# Altium PCB PCB_HNano.pcbdoc
Units mil, origin at the board's own origin, x right, y up, seen from the top; angles counter-clockwise.
Board outline 4465 x 4795 mil, 2 copper layers (Top Layer, Bottom Layer); 16 components, 38 nets, 80 pads, 20 vias.
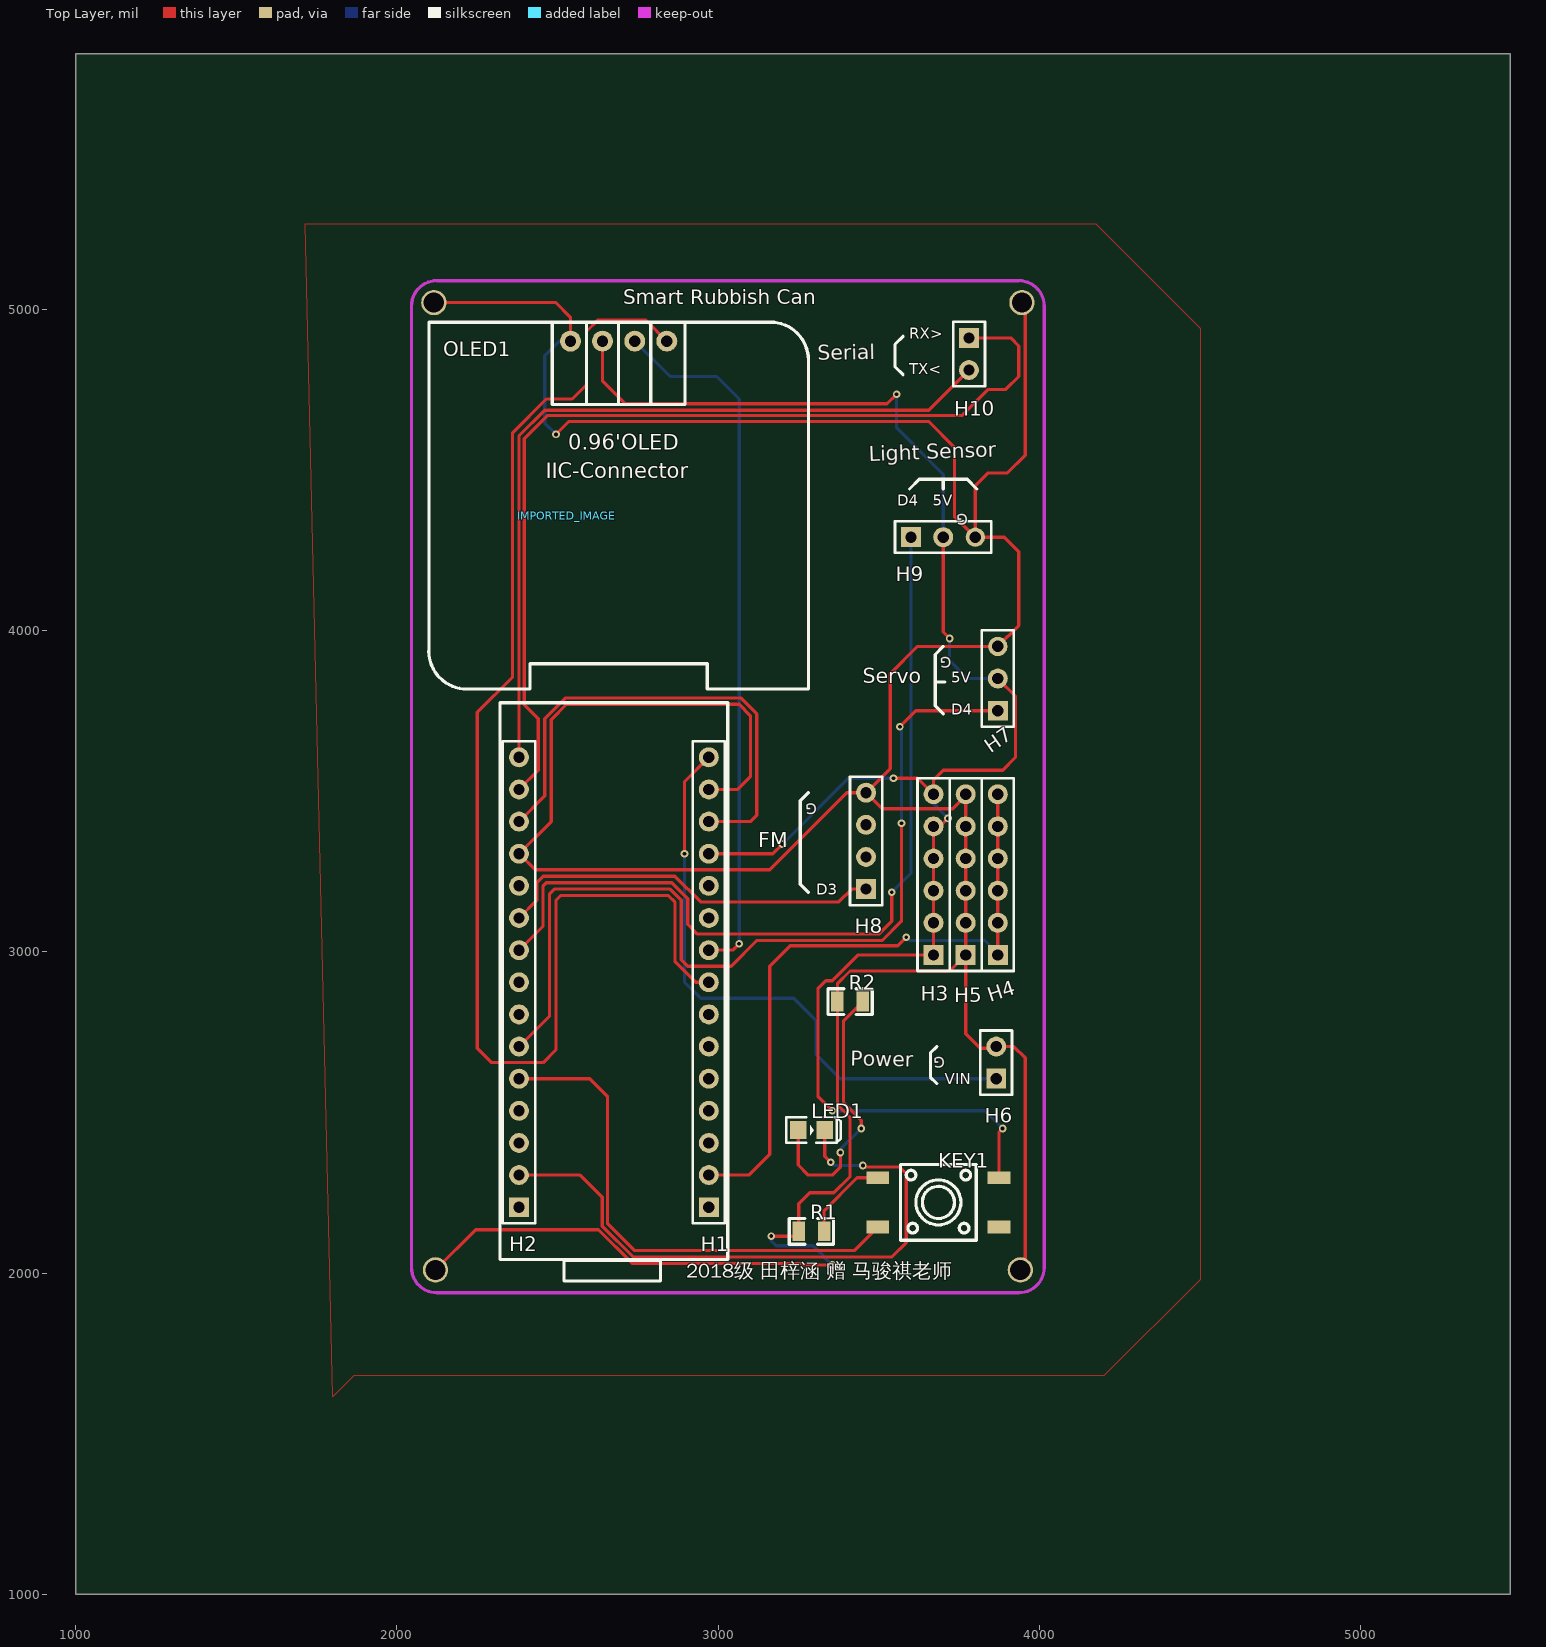
[diagram p0: Top Layer view]
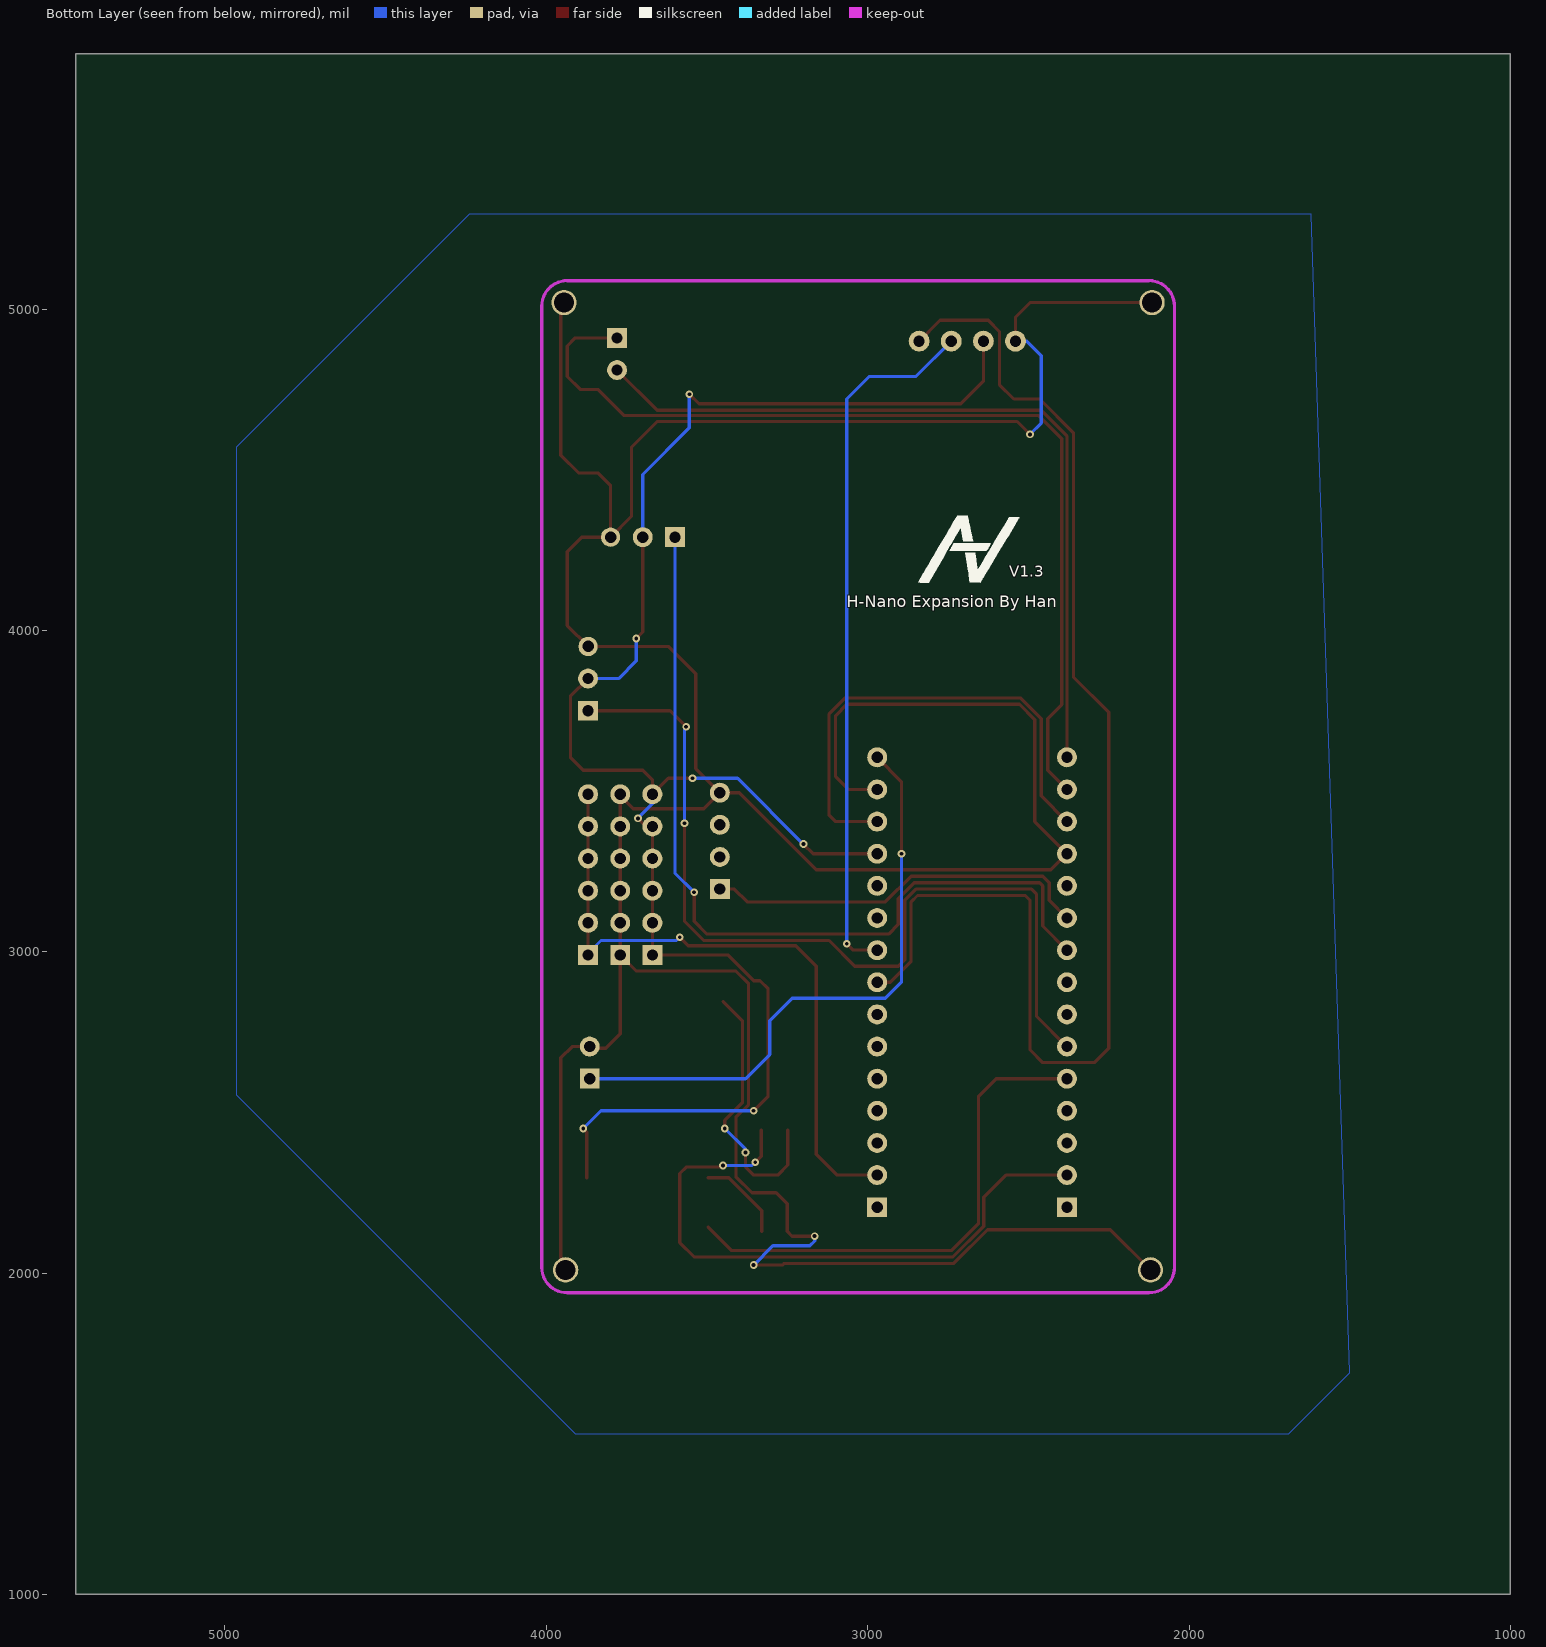
[diagram p1: Bottom Layer view, seen from below]

## Layer stack, top to bottom
Top Layer: signal copper (thickness not stored)
Dielectric: dielectric 12.6, FR-4, Dk 4.8
Bottom Layer: signal copper (thickness not stored)

## Board outline
5465,1000 1000,1000 1000,5795 5465,5795

## Components (designator, comment, footprint, x,y, rotation, side; value= is the part's Value field where it differs from the comment)
H1 "HDR-F-2.54_1x15" HDR-F-2.54_1X15 2970.55,2905 r90 top
H2 "HDR-F-2.54_1x15" HDR-F-2.54_1X15 2380,2905 r90 top
H3 "HDR-F-2.54_1x6" HDR-F-2.54_1X6 3670,3190 r90 top
H4 "HDR-F-2.54_1x6" HDR-F-2.54_1X6 3870,3190 r90 top
H5 "HDR-F-2.54_1x6" HDR-F-2.54_1X6 3770,3190 r90 top
H6 "HDR-F-2.54_1x2" HDR-F-2.54_1X2 3865,2655 r90 top
H7 "HDR-F-2.54_1x3" HDR-F-2.54_1X3 3870,3850 r90 top
H8 "HDR-F-2.54_1x4" HDR-F-2.54_1X4 3460,3345 r90 top
H9 "HDR-F-2.54_1x3" HDR-F-2.54_1X3 3700,4290 r0 top
H10 "HDR-F-2.54_1x2" HDR-F-2.54_1X2 3780,4860 r270 top
IMPORTED_IMAGE "IMPORTED_IMAGE" IMPORTED_IMAGE 2528.15,4357.48 r0 top
KEY1 "K4-6×6_SMD" KEY-SMD_4P-L6.0-W6.0-P3.90-LS10.0 3685,2220 r0 top
LED1 "LED-0805_B" LED0805_BLUE 3290,2445 r0 top
OLED1 "0.96OLED_4P" 0.96OLED_4P 2690,4900 r0 top
R1 "10k" R0805 3290,2130 r0 top
R2 "500R" R0805 3410,2845 r0 top

## Footprints (in the part's own frame and the unit in brackets; to place one, negate y for a bottom-side part, rotate by r counter-clockwise, add the part's x,y. Pads: shape width x height; smd on the part's side, far side on the other; paste and mask are expansions set on the pad)
0.96OLED_4P [mm]
  round 1.65 hole 0.89: 1(-3.81,-0.001) 2(-1.27,0.002) 3(1.27,0.002) 4(3.81,0.002)
  silkscreen extent -15,-27.5 15,1.5
HDR-F-2.54_1X2 [mil]
  rect 62x62 hole 35: 1(-50,0)
  round 62 hole 35: 2(50,0)
  silkscreen extent -100,-49 100,50
HDR-F-2.54_1X3 [mil]
  rect 62x62 hole 35: 1(-100,0)
  round 62 hole 35: 2(0,0)
  round 60 hole 36: 3(100,0)
  silkscreen extent -150,-49 150,50
HDR-F-2.54_1X4 [mil]
  rect 62x62 hole 35: 1(-150,0)
  round 62 hole 35: 2(-50,0) 3(50,0) 4(150,0)
  silkscreen extent -200,-50 200,50
HDR-F-2.54_1X6 [mil]
  rect 62x62 hole 35: 1(-200,0)
  round 62 hole 35: 2(-100,0) 3(0,0) 4(100,0) 5(200,0) 6(300,0)
  silkscreen extent -250,-50 350,50
HDR-F-2.54_1X15 [mil]
  rect 62x62 hole 35: 1(-700,0)
  round 62 hole 35: 2(-600,0) 3(-500,0) 4(-400,0) 5(-300,0) 6(-200,0) 7(-100,0) 8(0,0) 9(100,0) 10(200,0) 11(300,0) 12(400,0) 13(500,0) 14(600,0) 15(700,0)
  silkscreen extent -750,-50 750,50
IMPORTED_IMAGE [mil]
KEY-SMD_4P-L6.0-W6.0-P3.90-LS10.0 [mm]
  rect 1.8x1 smd: 1(-4.8,1.95) 2(4.8,1.95) 3(-4.8,-1.95) 4(4.8,-1.95)
  silkscreen extent -3,-3 3,3
LED0805_BLUE [mil]
  rect 51.2x55.1 smd: 1(-41.35,0) 2(41.35,0)
  silkscreen extent -79,-39 91,39
R0805 [mm]
  rect 1x1.55 smd: 1(-1,0) 2(1,0)
  silkscreen extent -1.75,-1.02 1.75,1.02

## Free pads (board coordinates)
  round 78.74 hole 62.99: 1(2115,5020) 1(2120,2010) 1(3940,2010) 1(3945,5020)

## Via types
v1: diameter 24, hole 12, Top Layer to Bottom Layer, 20 vias

## Nets (pads, with @x,y where several pads share a name; then routed paths per layer and width w, separated by ;. In a path a pad name is that pad's centre, name@x,y a point inside that pad or via, vN(x,y) a via of type N, cw(c..) or ccw(c..) an arc to the next point about the centre after c; other vN are vias at no path point)
3V: H1.2 H4.1 H4.2 H4.3 H4.4 H4.5 H4.6 | length 2074.4
  Top Layer w10: H1.2 3095,2305 3160,2370 3160,2955 3223.95,3018.95 3558.95,3018.95 v1(3585,3045) ; H4.1 H4.2 H4.3 H4.4 H4.5 H4.6
  Bottom Layer w10: v1(3585,3045) 3595,3035 3830,3035 3870,2995 H4.1
5V: H1.12 H3.1 H3.2 H3.3 H3.4 H3.5 H3.6 H7.2 H9.2 KEY1.2 OLED1.2 | length 5628.6
  Top Layer w10: OLED1.2@2640,4900.05 2640,4775 2710,4705 3525,4705 v1(3555,4735) ; H1.12 3170,3305 v1(3200,3335) ; v1(3355,2505) 3310,2550 3310,2885 3335,2910 3355,2910 3435,2990 H3.1 H3.2 H3.3 H3.4 H3.5 3690,3390 v1(3715,3415) ; v1(3545,3540) 3620,3540 H3.6 3670,3535 3700,3565 3885,3565 3925,3605 3925,3795 H7.2 ; H9.2 3700,3995 v1(3720,3975) ; KEY1.2 3873.98,2438.98 v1(3885,2450)
  Bottom Layer w10: v1(3200,3335) 3405,3540 v1(3545,3540) ; v1(3355,2505) 3830,2505 v1(3885,2450) ; v1(3555,4735) 3555,4630 3700,4485 H9.2 ; H3.6 3670,3460 v1(3715,3415) ; v1(3720,3975) 3720,3905 3775,3850 H7.2
A0: H1.4
A1: H1.5
A2: H1.6
A3: H1.7
A4: H1.8 OLED1.4 | length 4156.3
  Top Layer w10: OLED1.4@2840,4900.05 2775.05,4965 2625,4965 2590,4930 2590,4765 2545,4720 2465,4720 2360,4615 2360,3855 2250,3745 2250,2700 2295,2655 2455,2655 2495,2695 2495,3160 2510,3175 2845,3175 2865,3155 2865,2970 2930,2905 H1.8
A5: H1.9 OLED1.3 | length 2197.3
  Top Layer w10: H1.9 3045,3005 v1(3065,3025)
  Bottom Layer w10: OLED1.3@2740,4900.05 2850.05,4790 2995,4790 3065,4720 v1(3065,3025)
A6: H1.10
A7: H1.11
D2: H2.11
D3: H2.10 H8.1 | length 1215.8
  Top Layer w10: H2.10 2435,3160 2435,3215 2455,3235 2865,3235 2945,3155 3375,3155 3415,3195 H8.1
D4: H2.9 H9.1 | length 2669.8
  Top Layer w10: H2.9 2455,3080 2455,3205 2465,3215 2855,3215 2905,3165 2905,3085 2935,3055 3500,3055 3540,3095 v1(3540,3185)
  Bottom Layer w10: v1(3540,3185) 3600,3245 H9.1
D5: H2.8
D6: H2.7
D7: H2.6 H7.1 | length 2814.1
  Top Layer w10: H2.6 2475,2800 2475,3180 2490,3195 2850,3195 2885,3160 2885,2975 2905,2955 3040,2955 3120,3035 3510,3035 3570,3095 3570,3155 v1(3570,3400) ; v1(3565,3700) 3615,3750 H7.1
  Bottom Layer w10: v1(3565,3700) 3570,3695 v1(3570,3400)
D8: H2.5 KEY1.3 | length 1599.3
  Top Layer w10: H2.5 2600,2605 2655,2550 2655,2155 2740,2070 3422.81,2070 KEY1.3
D9: H2.4
D10: H2.3
D11: H2.2 LED1.2 | length 1954.2
  Top Layer w10: H2.2 2570,2305 2638.95,2236.05 2638.95,2146.05 2735,2050 3540,2050 3585,2095 3585,2310 3565,2330 3455,2330 v1(3450,2335) ; LED1.2 3331.35,2363.65 v1(3350,2345)
  Bottom Layer w10: v1(3350,2345) 3360,2335 v1(3450,2335)
D12: H2.1
D13: H1.1
G: H1.14 H2.12 H5.1 H5.2 H5.3 H5.4 H5.5 H5.6 H6.2 H7.3 H8.4 H9.3 OLED1.1 pad.1 R1.1 R2.1 | length 12180.1
  Top Layer w10: pad.1@2115,5020 2495,5020 2540,4975 OLED1.1 ; pad.1@2120,2010 2245,2135 2627.3,2135 2732.3,2030 3260,2030 3265,2025 v1(3355,2025) ; v1(2495,4610) 2535,4650 3655,4650 3735,4570 3735,4355 H9.3 ; H1.14 3060,3505 3100,3545 3100,3735 3065,3770 2527.7,3770 2480,3722.3 2480,3405 H2.12 2430,3255 3160,3255 3400,3495 H8.4 ; v1(3165,2115) 3235.63,2115 R1.1 3250.63,2215.63 3285,2250 3360,2250 3410,2300 3410,2485 3370.63,2524.37 R2.1 3370.63,2900.63 3410,2940 3720,2940 H5.1 ; pad.1@3940,2010 3955,2025 3955,2670 3920,2705 H6.2 3860,2700 3815,2700 3770,2745 H5.1 ; pad.1@3945,5020 3955,5010 3955,4545 3900,4490 3840,4490 3800,4450 H9.3 ; H8.4 3535,3570 3535,3865 3620,3950 H7.3 3935,4015 3935,4245 3890,4290 H9.3 ; H8.4 3510,3445 3730,3445 3770,3485 H5.6 H5.5 H5.4 H5.3 H5.2 H5.1
  Bottom Layer w10: v1(2495,4610) 2460,4645 2460,4855 2504.95,4899.95 OLED1.1 ; v1(3165,2115) 3165,2100 3180,2085 3295,2085 v1(3355,2025)
H6_1: H6.1
KEY1_1: KEY1.1 R1.2 | length 273.4
  Top Layer w10: R1.2 3329.37,2194.37 3431.77,2296.77 KEY1.1
LED1_1: LED1.1 R2.2 | length 852.6
  Top Layer w10: LED1.1 3248.65,2336.35 3280,2305 3355,2305 3380,2330 v1(3380,2375) ; v1(3445,2450) 3445,2475 3390,2530 3390,2785.63 R2.2
  Bottom Layer w10: v1(3380,2375) 3380,2385 v1(3445,2450)
REF: H1.3
RST: H1.13 H2.13 | length 1533.5
  Top Layer w10: H2.13 2460,3485 2460,3725 2525,3790 3070,3790 3120,3740 3120,3425 3100,3405 H1.13
RX>: H2.14 H10.1 | length 3013.7
  Top Layer w10: H2.14 2440,3565 2440,3725 2396.05,3768.95 2396.05,4596.05 2468.95,4668.95 3758.95,4668.95 3840,4750 3895,4750 3935,4790 3935,4885 3910,4910 H10.1
S$800: 
S$802: 
S$852: 
S$987: 
S$989: 
S$991: 
S$994: 
TX<: H2.15 H10.2 | length 2484.9
  Top Layer w10: H2.15 2380,4605 2460,4685 3655,4685 H10.2
VIN: H1.15 | length 1887.1
  Top Layer w10: v1(2895,3305) 2895,3529.45 H1.15
  Bottom Layer w10: v1(2895,3305) 2895,2905 2945,2855 3235,2855 3305,2785 3305,2680 3380,2605 3865,2605
pads on no net: H8.2 H8.3 KEY1.4

## Polygon pours and split planes (outlines as drawn)
G on Top Layer (solid): 1715,5265 4175,5265 4500,4940 4500,1980 4200,1680 1865,1680 1800,1615
G on Bottom Layer (solid): 1620,5295 4240,5295 4965,4570 4965,2555 3910,1500 1690,1500 1500,1690

## Keep-outs
Keep-Out Layer:
  lines w10: 2045.59,2017.44 ccw(c2124.33,2017.44) 2124.33,1938.7 ; 2045.59,5009.57 cw(c2124.33,5009.57) 2124.33,5088.31 ; 3935.35,1938.7 ccw(c3935.35,2017.44) 4014.09,2017.44 ; 3935.35,5088.31 cw(c3935.35,5009.57) 4014.09,5009.57

## Silkscreen, mask and mechanical layers (free items; w line width, h text height)
Top Overlay:
  lines w10: 2320.55,2042.72 3029.21,2042.72 3029.21,3775 2320.55,3775 2320.55,2042.72 ; 2520,1975 2820,1975 2820,2040 2520,2040 2520,1975
  lines w10 net S$800: 3700,3740 3675,3765 3675,3925 3700,3950
  lines w10 net S$802: 3675,3839.68 3705,3839.68
  lines w10 net S$852: 3680,2590 3660,2610 3660,2685 3680,2705
  lines w10 net S$987: 3280,3185 3255,3210 3255,3470 3280,3495
  lines w10 net S$989: 3595,4440 3625,4470 3775,4470 3805,4440
  lines w10 net S$991: 3699.41,4470 3700,4469.41 3700,4440
  lines w10 net S$994: 3575,4795 3550,4820 3550,4890 3575,4915
  text "Smart Rubbish Can" at 2705,5000 h78.74
  text "RX>" at 3595,4895 h59.05
  text "Serial" at 3310,4825 h80 r1
  text "TX<" at 3595,4785 h59.05
  text "Light Sensor" at 3470,4510 h80 r2
  text "D4" at 3556.91,4375.97 h59.05
  text "5V" at 3666.91,4375.97 h59.05
  text "G" at 3776.91,4375.97 h59.05 r182
  text "G" at 3725,3930 h59.05 r182
  text "5V" at 3725,3825 h59.05
  text "Servo" at 3450,3820 h80
  text "D4" at 3725,3725 h59.05
  text "G" at 3306.9,3475 h59.05 r182
  text "FM" at 3125,3310 h80
  text "D3" at 3305,3165 h59.05
  text "G" at 3705,2685 h59.05 r182
  text "Power" at 3410,2630 h80 r359
  text "VIN" at 3705,2575 h59.05
  text "2018级 田梓涵 赠 马骏祺老师" at 2900,1970 h78.74
Bottom Overlay:
  text "V1.3" at 2560,4155 h59.05
  text "H-Nano Expansion By Han" at 3065,4060 h62.99
Document:
  lines w0.1: 3231.5,3396.5 3233.5,3398.5

## Text inside footprints (layer, text, board x,y; h text height)
OLED1: Top Overlay "IIC-Connector" at 2463.4,4472.94 h47.24; Top Overlay "0.96'OLED" at 2532.6,4561.43 h47.24